# Altium PCB USB-Ethernet.PcbDoc
Units mm, origin at the board's own origin, x right, y up, seen from the top; angles counter-clockwise.
Board outline 152.4 x 101.6 mm, 2 copper layers (Top Layer, Bottom Layer); 1 components, 0 nets, 64 pads, 0 vias.
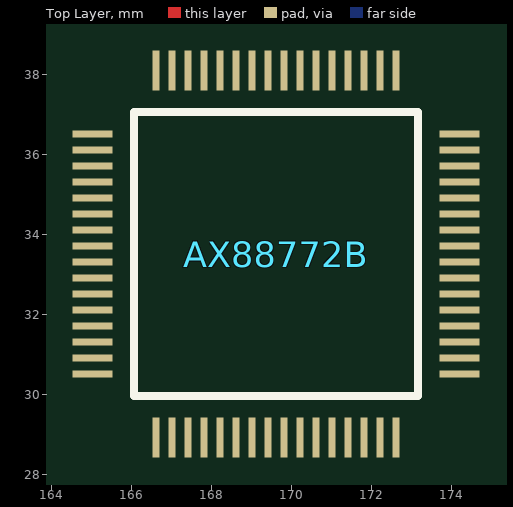
[diagram p0: Top Layer view]
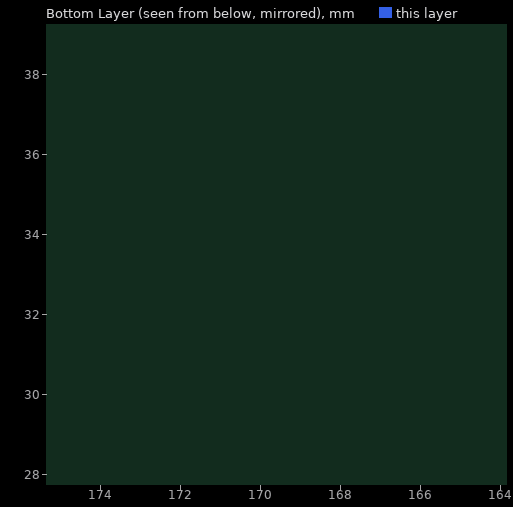
[diagram p1: Bottom Layer view, seen from below]

## Layer stack, top to bottom
Top Solder: solder mask 0.0102, Solder Resist, Dk 3.5
Top Layer: signal copper 0.0356
Dielectric 1: dielectric 0.32, FR-4, Dk 4.8
Bottom Layer: signal copper 0.0356
Bottom Solder: solder mask 0.0102, Solder Resist, Dk 3.5

## Board outline
25.4,25.4 177.8,25.4 177.8,127 25.4,127

## Design rules (kind name [scope] priority, off if disabled: settings)
Clearance [All] p1: gap=0.254 ignorepadtopadclearanceinfootprint=FALSE except(0: Arc-Hole Track-Hole SMDPad-Hole THPad-Hole Via-Hole Fill-Hole Poly-Hole Region-Hole Text-Hole)
PolygonConnect [All] p1: connectstyle=Relief reliefconductorwidth=0.254 reliefentries=4 polygonreliefangle="90 Angle" airgapwidth=0.254
RoomDefinition USB-Ethernet [InComponentClass('USB-Ethernet')] p1: confinementstyle=ConfineIn formatcopy=TRUE lockcomponents=FALSE outline 178.943,26.797 191.516,26.797 191.516,40.132 178.943,40.132
RoutingVias [All] p1: holewidth=0.711 width=1.27 viastyle="Through Hole" minholewidth=0.711 minwidth=1.27 maxholewidth=0.711 maxwidth=1.27
SolderMaskExpansion [All] p1: expansion=0.102
Width [All] p1: maxlimit=0.254 minlimit=0.254 preferedwidth=0.254
30 further rules are at their usual default settings.

## Components (designator, comment, footprint, x,y, rotation, side; value= is the part's Value field where it differs from the comment)
AX88772B "AX88772B" AX88772B 166.618,28.92 r0 top

## Footprints (in the part's own frame and the unit in brackets; to place one, negate y for a bottom-side part, rotate by r counter-clockwise, add the part's x,y. Pads: shape width x height; smd on the part's side, far side on the other; paste and mask are expansions set on the pad)
AX88772B [mm]
  rect 0.18x1 smd: 1(0,0) 2(0.4,0) 3(0.8,0) 4(1.2,0) 5(1.6,0) 6(2,0) 7(2.4,0) 8(2.8,0) 9(3.2,0) 10(3.6,0) 11(4,0) 12(4.4,0) 13(4.8,0) 14(5.2,0) 15(5.6,0) 16(6,0) 33(6,9.18) 34(5.6,9.18) 35(5.2,9.18) 36(4.8,9.18) 37(4.4,9.18) 38(4,9.18) 39(3.6,9.18) 40(3.2,9.18) 41(2.8,9.18) 42(2.4,9.18) 43(2,9.18) 44(1.6,9.18) 45(1.2,9.18) 46(0.8,9.18) 47(0.4,9.18) 48(0,9.18)
  rect 1x0.18 smd: 17(7.59,1.59) 18(7.59,1.99) 19(7.59,2.39) 20(7.59,2.79) 21(7.59,3.19) 22(7.59,3.59) 23(7.59,3.99) 24(7.59,4.39) 25(7.59,4.79) 26(7.59,5.19) 27(7.59,5.59) 28(7.59,5.99) 29(7.59,6.39) 30(7.59,6.79) 31(7.59,7.19) 32(7.59,7.59) 49(-1.59,7.59) 50(-1.59,7.19) 51(-1.59,6.79) 52(-1.59,6.39) 53(-1.59,5.99) 54(-1.59,5.59) 55(-1.59,5.19) 56(-1.59,4.79) 57(-1.59,4.39) 58(-1.59,3.99) 59(-1.59,3.59) 60(-1.59,3.19) 61(-1.59,2.79) 62(-1.59,2.39) 63(-1.59,1.99) 64(-1.59,1.59)
  silkscreen extent -0.56,1.03 6.55,8.14

## Nets (pads, with @x,y where several pads share a name; then routed paths per layer and width w, separated by ;. In a path a pad name is that pad's centre, name@x,y a point inside that pad or via, vN(x,y) a via of type N, cw(c..) or ccw(c..) an arc to the next point about the centre after c; other vN are vias at no path point)
pads on no net: AX88772B.1 AX88772B.2 AX88772B.3 AX88772B.4 AX88772B.5 AX88772B.6 AX88772B.7 AX88772B.8 AX88772B.9 AX88772B.10 AX88772B.11 AX88772B.12 AX88772B.13 AX88772B.14 AX88772B.15 AX88772B.16 AX88772B.17 AX88772B.18 AX88772B.19 AX88772B.20 AX88772B.21 AX88772B.22 AX88772B.23 AX88772B.24 AX88772B.25 AX88772B.26 AX88772B.27 AX88772B.28 AX88772B.29 AX88772B.30 AX88772B.31 AX88772B.32 AX88772B.33 AX88772B.34 AX88772B.35 AX88772B.36 AX88772B.37 AX88772B.38 AX88772B.39 AX88772B.40 AX88772B.41 AX88772B.42 AX88772B.43 AX88772B.44 AX88772B.45 AX88772B.46 AX88772B.47 AX88772B.48 AX88772B.49 AX88772B.50 AX88772B.51 AX88772B.52 AX88772B.53 AX88772B.54 AX88772B.55 AX88772B.56 AX88772B.57 AX88772B.58 AX88772B.59 AX88772B.60 AX88772B.61 AX88772B.62 AX88772B.63 AX88772B.64